# Altium PCB PCB.pcbdoc
Units mm, origin at the board's own origin, x right, y up, seen from the top; angles counter-clockwise.
Board outline 111.7 x 68.8 mm, 2 copper layers (Top Layer, Bottom Layer); 48 components, 41 nets, 192 pads, 85 vias.
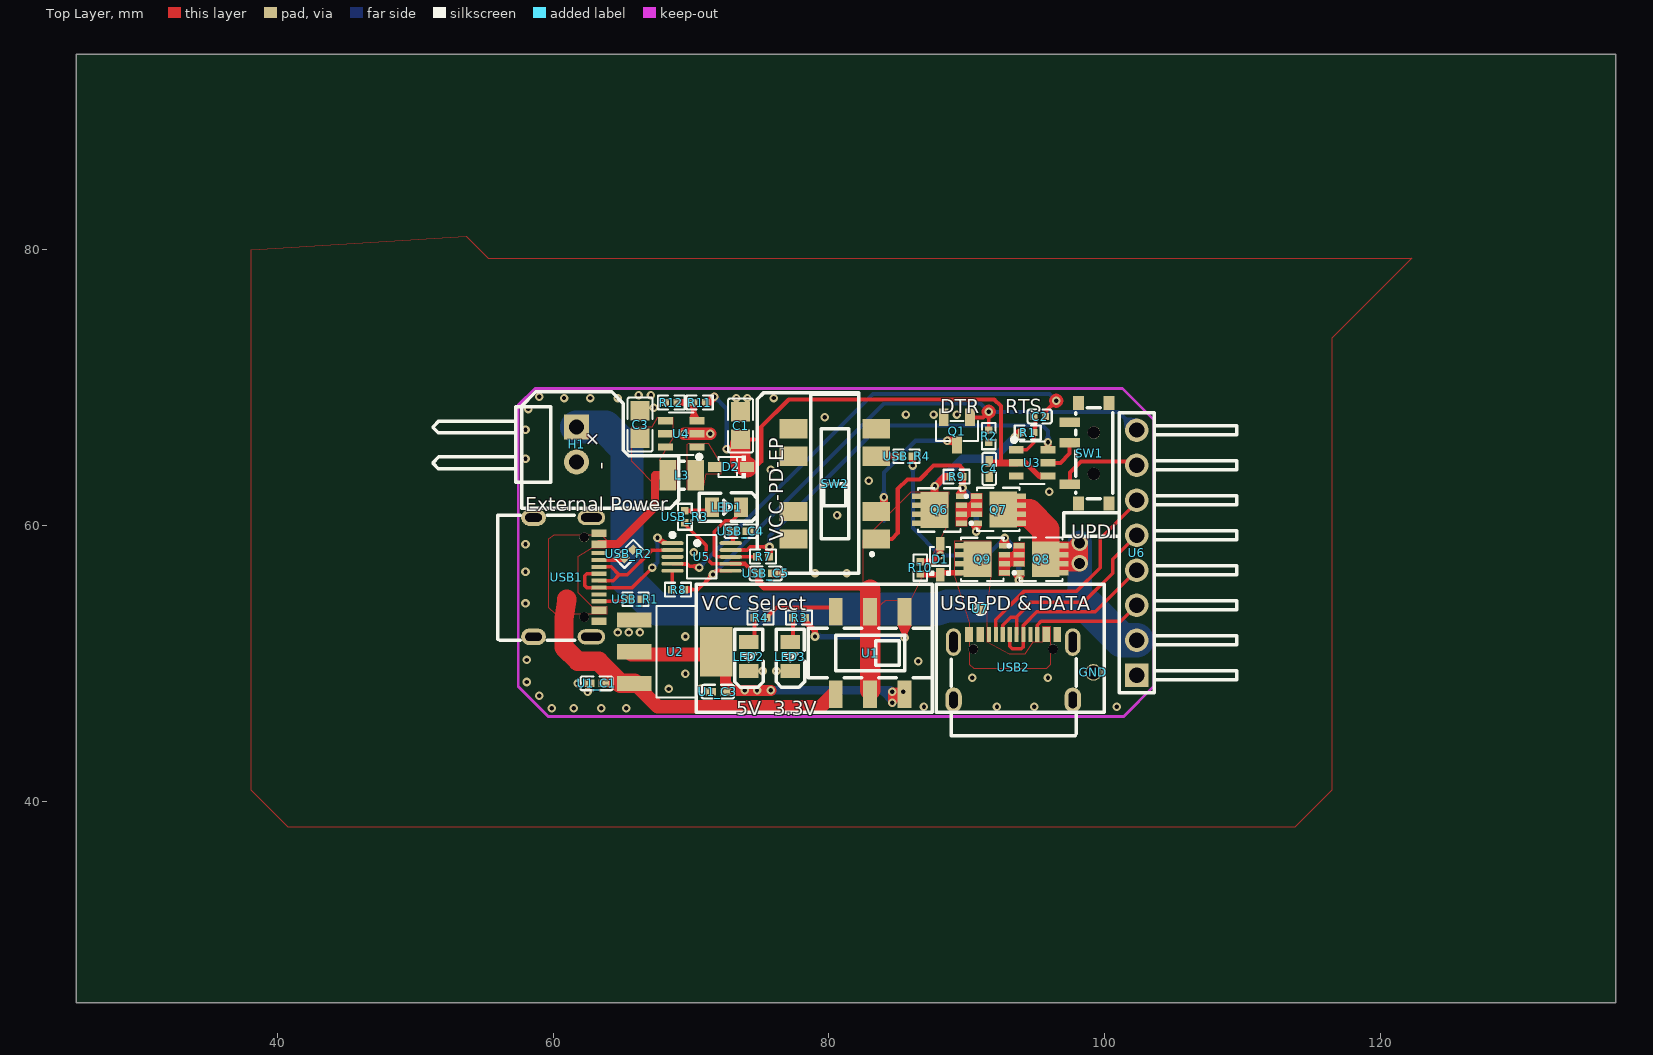
[diagram p0: Top Layer view]
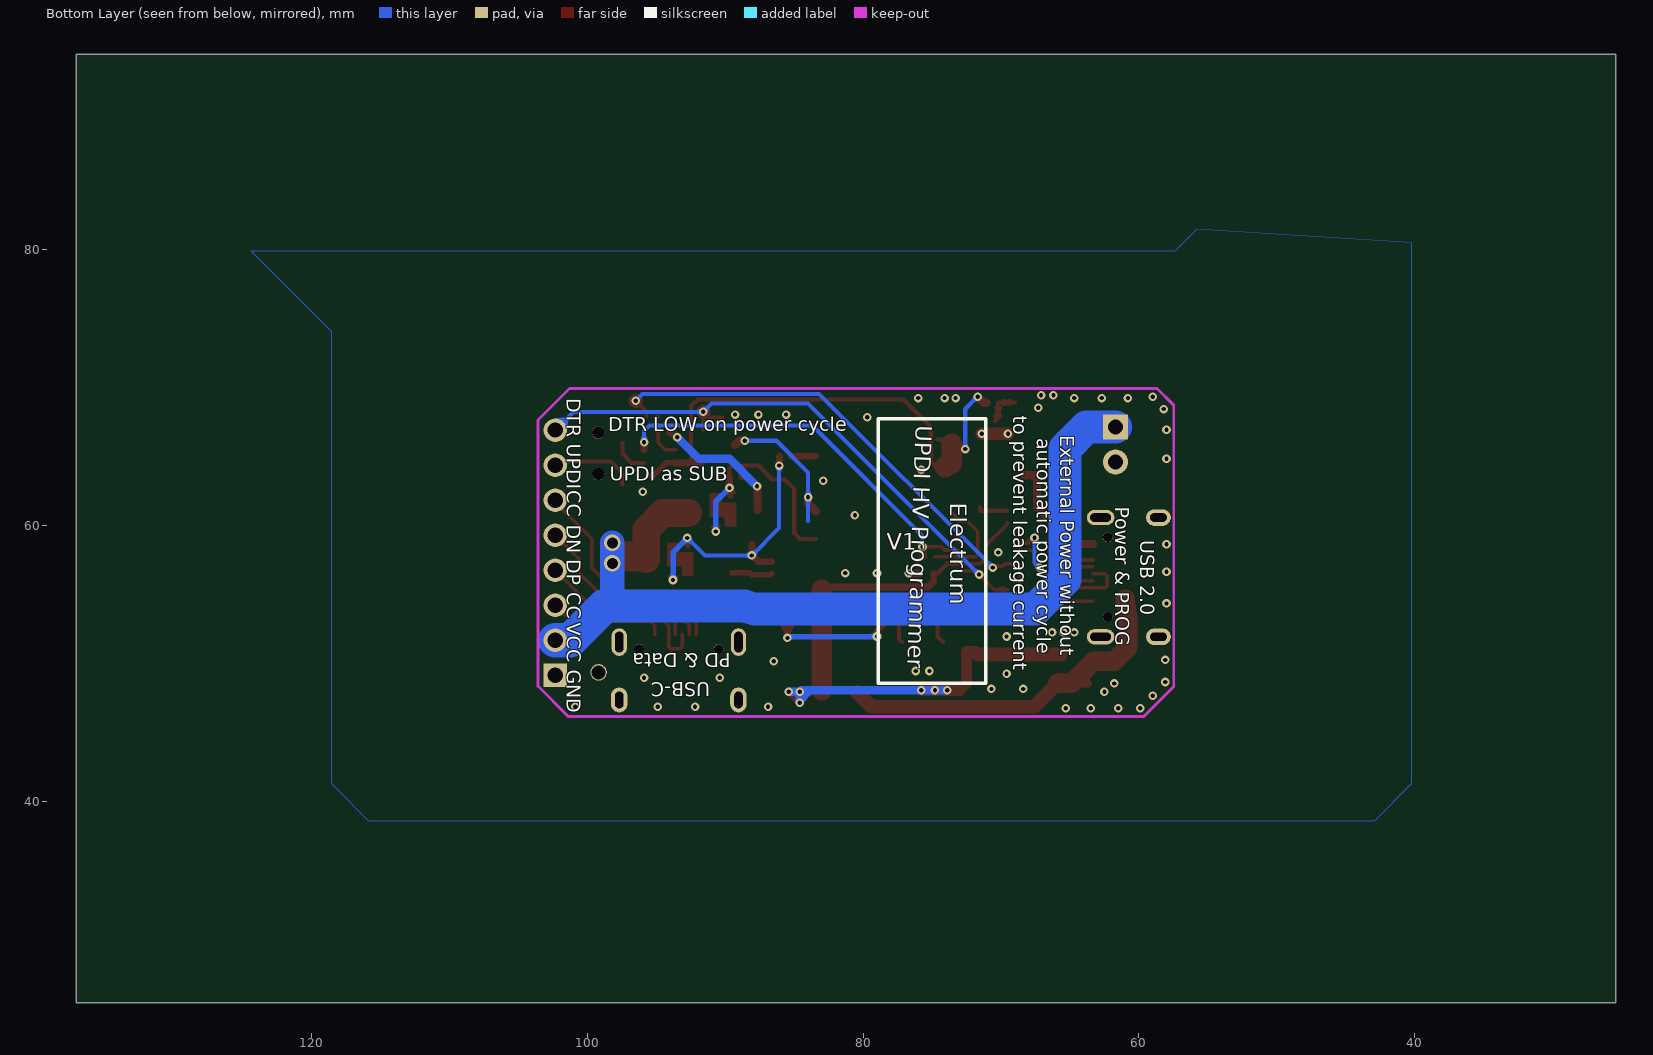
[diagram p1: Bottom Layer view, seen from below]

## Layer stack, top to bottom
Top Layer: signal copper (thickness not stored)
Dielectric: dielectric 0.32, FR-4, Dk 4.8
Bottom Layer: signal copper (thickness not stored)

## Board outline
137.1,25.4 25.4,25.4 25.4,94.2 137.1,94.2

## Components (designator, comment, footprint, x,y, rotation, side; value= is the part's Value field where it differs from the comment)
C1 "10uF" C0805 73.6,67.25 r270 top
C2 "10nF" C0402#1 95.3,67.91 r0 top
C3 "10uF" C0805 66.309,67.325 r270 top
C4 "100nF" C0402#2 91.64,64.115 r90 top
D1 "20V Zener" SOD-323_L1.7-W1.3-LS2.5-RD-1 88.082,57.55 r90 top
D2 "1N5819WS" SOD-323_L1.8-W1.3-LS2.5-RD 72.9,64.25 r180 top
DTR "TESTPOINT" TEST_TESTPOINT 91.6,68.25 r270 top
GND "CC" RINGTESTPOINT 99.2,49.35 r0 top
H1 "PZ254R-11-02P" HDR-TH_2P-P2.54-H-M-W10.4 61.7,65.88 r270 top
L3 "10uH" IND-SMD_L2.5-W2.0 69.335,63.646 r0 top
LED1 "Green" LED0805-R-RD 72.59,61.33 r180 top
LED2 "Red" LED0805-R-RD 74.2,50.5 r90 top
LED3 "Green" LED0805-R-RD 77.2,50.5 r90 top
Q1 "AO3400A" SOT-23-3_L2.9-W1.3-P1.90-LS2.4-BR 89.3,66.85 r90 top
Q6 "DOZ30P03" PDFN-8_L3.1-W3.0-P0.65-LS3.3-BL 88.02,61.145 r90 top
Q7 "DOZ30P03" PDFN-8_L3.1-W3.0-P0.65-LS3.3-BL 92.3,61.15 r270 top
Q8 "DOZ30P03" PDFN-8_L3.1-W3.0-P0.65-LS3.3-BL 95.4,57.55 r270 top
Q9 "DOZ30P03" PDFN-8_L3.1-W3.0-P0.65-LS3.3-BL 91.14,57.555 r90 top
R1 "10kΩ" R0402 94.433,66.75 r180 top
R2 "100kΩ" R0402 91.6,66.483 r270 top
R3 "1kΩ" R0402 77.842,53.325 r180 top
R4 "1kΩ" R0402 75.042,53.325 r180 top
R7 "1kΩ" R0402 75.233,57.75 r0 top
R8 "4.7kΩ" R0402 69.067,55.35 r180 top
R9 "100kΩ" R0402 89.267,63.55 r180 top
R10 "100kΩ" R0402 86.64,56.943 r270 top
R11 "100kΩ" R0402 70.641,68.925 r0 top
R12 "5.1kΩ" R0402 68.576,68.925 r0 top
RTS "TESTPOINT" TEST_TESTPOINT 96.5,69.05 r0 top
SW1 "MS-12C02-G015" SW-SMD_MS-12C02-G015 98.9,65.25 r270 top
SW2 "MST23D18G2 125" SW-SMD_SHOU_MST23D18G2 80.442,63.025 r90 top
U1 "YSSP2AG00" SW-SMD_YSSP2AG00 83,50.75 r180 top
U1_C1 "10uF" C0402#2 63.155,48.55 r180 top
U1_C3 "10uF" C0402#2 71.955,47.95 r0 top
U2 "AMS1117-3.3" SOT-223-3_L6.5-W3.4-P2.30-LS7.0-BR 68.87,50.85 r180 top
U3 "COS4561TR" SOT-23-6_L2.9-W1.6-P0.95-LS2.8-TL 94.749,64.55 r0 top
U4 "MT3608" SOT-23-6_L2.9-W1.6-P0.95-LS2.8-BL 69.3,66.65 r90 top
U5 "CH340X" MSOP-10_L3.0-W3.0-P0.50-LS5.0-BL 70.775,57.725 r270 top
U6 "X6511WR-08H-C30D60R1" HDR-TH_8P-P2.54-H-M-W7.7-P 102.34,58.03 r90 top
U7 "PD" TESTPOINT 91,53.95 r0 top
USB1 "TYPE-C 16PIN 2MD(073)" USB-C-SMD_TYPE-C-6PIN-2MD-073 60.96,56.255 r270 top
USB2 "TYPE-C 16PIN 2MD(073)" USB-C-SMD_TYPE-C-6PIN-2MD-073 93.375,49.725 r0 top
USB_C4 "100nF" C0402#2 73.605,59.59 r0 top
USB_C5 "100nF" C0402#2 75.43,56.525 r180 top
USB_R1 "5.1kΩ" R0402 65.967,54.65 r0 top
USB_R2 "5.1kΩ" R0402 65.494,57.944 r45 top
USB_R3 "5.1kΩ" R0402 69.56,60.637 r270 top
USB_R4 "5.1kΩ" R0402 85.64,65.03 r180 top

## Footprints (in the part's own frame and the unit in brackets; to place one, negate y for a bottom-side part, rotate by r counter-clockwise, add the part's x,y. Pads: shape width x height; smd on the part's side, far side on the other; paste and mask are expansions set on the pad)
C0402#1 [mm]
  rect 0.5x0.54 smd paste+0 mask+0.051: 1(-0.42,0) 2(0.42,0)
  silkscreen extent -0.87,-0.5 0.87,0.5
C0402#2 [mm]
  rect 0.79x0.54 smd paste-100 mask+0.051: 1(-0.545,0) 2(0.545,0)
  silkscreen extent -1.17,-0.5 1.17,0.5
C0805 [mm]
  rect 1.41x1.35 smd paste-100 mask+0.051: 1(-1,0) 2(1,0)
  silkscreen extent -1.96,-0.9 1.96,0.9
HDR-TH_2P-P2.54-H-M-W10.4 [mm]
  rect 1.8x1.8 hole 1.1 paste+0 mask+0.051: 1(-1.27,0)
  round 1.8 hole 1.1 paste+0 mask+0.051: 2(1.27,0)
  silkscreen extent -2.74,-10.4 2.74,-1.86
HDR-TH_8P-P2.54-H-M-W7.7-P [mm]
  rect 1.7x1.7 hole 1.1 paste+0 mask+0.05: 1(-8.89,0)
  round 1.7 hole 1.1 paste+0 mask+0.05: 2(-6.35,0) 3(-3.81,0) 4(-1.27,0) 5(1.27,0) 6(3.81,0) 7(6.35,0) 8(8.89,0)
  silkscreen extent -10.17,-7.25 10.17,1.27
IND-SMD_L2.5-W2.0 [mm]
  rect 1.2x2.2 smd paste+0 mask+0.051: 1(1.028,0) 2(-1.028,0)
  silkscreen extent -0.2,-1.02 0.2,1.02
LED0805-R-RD [mm]
  rect 1x1.4 smd paste+0 mask+0.051: 1(1.05,0) 2(-1.05,0)
  silkscreen extent -2.22,-1.04 1.99,1.01
MSOP-10_L3.0-W3.0-P0.50-LS5.0-BL [mm]
  oval 0.28x1.62 smd paste+0 mask+0.051: 1(-1,-2.11) 2(-0.5,-2.11) 3(0,-2.11) 4(0.5,-2.11) 5(1,-2.11) 6(1,2.11) 7(0.5,2.11) 8(0,2.11) 9(-0.5,2.11) 10(-1,2.11)
  silkscreen extent -1.74,-2.26 1.58,1.07
PDFN-8_L3.1-W3.0-P0.65-LS3.3-BL [mm]
  rect 0.4x0.8 smd paste-100 mask+0.051: 1(-0.975,-1.6) 2(-0.325,-1.6) 3(0.325,-1.6) 4(0.975,-1.6) 5(0.975,1.6) 6(0.325,1.6) 7(-0.325,1.6) 8(-0.975,1.6)
  rect 2.6x2 smd paste-100 mask+0.051: 9(-0.005,0.35)
  silkscreen extent -1.59,-2.41 1.56,1.55
R0402 [mm]
  rect 0.566x0.54 smd paste-100 mask+0.051: 1(-0.433,0) 2(0.433,0)
  silkscreen extent -0.94,-0.5 0.94,0.5
RINGTESTPOINT [mm]
  round 1.2 hole 1 paste+0 mask+0.102: 1(0,0)
SOD-323_L1.7-W1.3-LS2.5-RD-1 [mm]
  rect 0.985x0.6 smd paste+0 mask+0.051: 1(-1.117,0) 2(1.117,0)
  silkscreen extent -1.15,-0.73 0.9,0.73
SOD-323_L1.8-W1.3-LS2.5-RD [mm]
  rect 1x0.7 smd paste+0 mask+0.051: 1(-1.173,0) 2(1.173,0)
  silkscreen extent -1.08,-0.8 0.9,0.8
SOT-23-3_L2.9-W1.3-P1.90-LS2.4-BR [mm]
  rect 1.25x0.7 smd paste+0 mask+0.051: 1(1,-0.95) 2(1,0.95) 3(-1,0)
  silkscreen extent -0.73,-1.53 0.73,1.53
SOT-23-6_L2.9-W1.6-P0.95-LS2.8-BL [mm]
  rect 0.532x1.072 smd paste+0 mask+0.051: 1(-0.95,-1.149) 2(0,-1.149) 3(0.95,-1.149) 4(0.95,1.149) 5(0,1.149) 6(-0.95,1.149)
  silkscreen extent -1.82,-1.45 1.54,0.89
SOT-23-6_L2.9-W1.6-P0.95-LS2.8-TL [mm]
  rect 1.072x0.532 smd paste+0 mask+0.051: 1(-1.149,0.95) 2(-1.149,0) 3(-1.149,-0.95) 4(1.149,-0.95) 5(1.149,0) 6(1.149,0.95)
  silkscreen extent -1.45,-1.54 0.89,1.82
SOT-223-3_L6.5-W3.4-P2.30-LS7.0-BR [mm]
  rect 2.5x1.1 smd paste+0 mask+0.051: 1(2.97,-2.3) 2(2.97,0) 3(2.97,2.3)
  rect 2.34x3.6 smd paste+0 mask+0.051: 4(-2.97,0)
  silkscreen extent -1.57,-3.33 1.37,3.33
SW-SMD_MS-12C02-G015 [mm]
  rect 0.7x1.5 smd paste+0 mask+0.051: 1(2.25,-1.427) 2(-0.75,-1.427) 3(-2.25,-1.427)
  rect 1x0.8 smd paste+0 mask+0.051: 4(-3.65,-0.773) 5(-3.65,1.427) 6(3.65,1.427) 7(3.65,-0.773)
  round 0.9 hole 0.9 unplated paste+0: ""(-1.5,0.327) ""(1.5,0.327)
  silkscreen extent -3.3,-1 3.3,1.7
SW-SMD_SHOU_MST23D18G2 [mm]
  rect 1.4x2 smd paste+0 mask+0.051: 1(-4,-3) 2(-2,-3) 3(2,-3) 4(4,-3) 5(4,3) 6(2,3) 7(-2,3) 8(-4,3)
  silkscreen extent -6.5,-2.8 6.5,1.75
SW-SMD_YSSP2AG00 [mm]
  rect 1x2 smd paste+0 mask+0.05: 1(-2.5,3) 2(0,3) 3(2.5,3) 4(-2.5,-3) 5(0,-3) 6(2.5,-3)
  silkscreen extent -4.5,-1.8 4.5,1.8
TEST_TESTPOINT [mm]
  Top Layer region: -0.5,0 -0.496,0.06 -0.485,0.12 -0.468,0.177 -0.443,0.232 -0.411,0.284 -0.374,0.331 -0.331,0.374 -0.284,0.411 -0.232,0.443 -0.177,0.468 -0.12,0.485 -0.06,0.496 0,0.5 0,0.5 0.06,0.496 0.12,0.485 0.177,0.468 0.232,0.443 0.284,0.411 0.331,0.374 0.374,0.331 0.411,0.284 0.443,0.232 0.468,0.177 0.485,0.12 0.496,0.06 0.5,0 0.5,0 0.496,-0.06 0.485,-0.12 0.468,-0.177 0.443,-0.232 0.411,-0.284 0.374,-0.331 0.331,-0.374 0.284,-0.411 0.232,-0.443 0.177,-0.468 0.12,-0.485 0.06,-0.496 0,-0.5 0,-0.5 -0.06,-0.496 -0.12,-0.485 -0.177,-0.468 -0.232,-0.443 -0.284,-0.411 -0.331,-0.374 -0.374,-0.331 -0.411,-0.284 -0.443,-0.232 -0.468,-0.177 -0.485,-0.12 -0.496,-0.06
TESTPOINT [mm]
  round 1 smd paste+0 mask+0.102: 1(0,0)
  silkscreen extent -0.46,-0.46 0.46,0.46
USB-C-SMD_TYPE-C-6PIN-2MD-073 [mm]
  rect 0.55x1.1 smd paste-100 mask+0.05: 1(-3.2,2.375) 2(-2.4,2.375) 11(2.4,2.375) 12(3.2,2.375)
  rect 0.3x1.1 smd paste-100 mask+0.05: 3(-1.75,2.375) 4(-1.25,2.375) 5(-0.75,2.375) 6(-0.25,2.375) 7(0.25,2.375) 8(0.75,2.375) 9(1.25,2.375) 10(1.75,2.375)
  oval 1.1x2 hole 0.6 slot 1.5 at 90 deg paste+0 mask+0.05: 13(-4.325,1.825) 14(4.325,1.825)
  oval 1.2x1.8 hole 0.6 slot 1.2 at 90 deg paste+0 mask+0.05: 13(-4.325,-2.375) 14(4.325,-2.375)
  round 0.7 hole 0.7 unplated paste+0: ""(-2.89,1.305) ""(2.89,1.305)
  silkscreen extent -4.5,-4.97 4.57,0.6

## Via types
v1: diameter 0.62, hole 0.31, Top Layer to Bottom Layer, tented both sides, 83 vias
v2: diameter 1.2, hole 0.8, Top Layer to Bottom Layer, tented both sides, 2 vias

## Nets (pads, with @x,y where several pads share a name; then routed paths per layer and width w, separated by ;. In a path a pad name is that pad's centre, name@x,y a point inside that pad or via, vN(x,y) a via of type N, cw(c..) or ccw(c..) an arc to the next point about the centre after c; other vN are vias at no path point)
3.3V: U1.1 U1_C3.2 U2.2 U2.4 | length 31.1
  Top Layer w0.6: U1.1@85.075,47.925 85.375,47.925 v1(85.4,47.95) ; v1(84.6,47.95) v1(84.6,47.15) v1(85.4,47.95) ; v1(84.6,47.95) v1(85.4,47.95) ; v1(84.6,47.95) v1(85.4,47.95)
  Top Layer w0.8: U2.4@71.841,50.849 72.501,50.849 72.501,48.55 72.999,48.05 73.901,48.05 v1(74.8,48.05) v1(75.8,48.05)
  Top Layer w1: U2.2@65.7,50.65 U2.4@71.64,50.65
  Bottom Layer w0.6: v1(73.9,48.05) v1(74.8,48.05) v1(75.8,48.05) 84.5,48.05 v1(84.6,47.95) ; v1(84.6,47.95) v1(84.6,47.15) 84.6,47.307 83.957,47.95 v1(85.4,47.95) v1(84.6,47.95)
12V: C1.2 C4.2 D2.1 R11.2 U3.2 U3.4 | length 39.4
  Top Layer w0.3: C1.2@73.575,65.926 73.9,66.251 74.599,66.251 ; 74.599,64.151 75.099,64.649 75.099,67.151 77.098,69.15 92.001,69.15 92.491,68.66 92.491,64.55
  Top Layer w0.4: U3.2@93.601,64.55 94.299,64.55 95.249,63.6 U3.4@95.628,63.6
  Top Layer w0.5: C4.2 91.75,64.55 U3.2
  Top Layer w0.6: R11.2@71.081,68.913 71.263,68.913 v1(71.7,69.35) ; v1(72.6,65.55) 73.2,65.55 C1.2@73.575,65.925
  Top Layer w1.5: C1.2@73.575,65.925 73.575,64.497 D2.1
  Bottom Layer w0.3: v1(71.7,69.35) 72.6,68.45 v1(72.6,65.55)
DN: U5.2 USB1.5 USB1.7 | length 7.9
  Top Layer w0.254: USB1.7 64.354,56.005 64.782,56.433 ; USB1.5 64.209,57.005 64.782,56.433 ; U5.2@68.666,58.225 67.175,58.225 65.384,56.432 64.782,56.432
DP: U5.1 USB1.6 USB1.8 | length 10.9
  Top Layer w0.254: USB1.8 62.445,55.505 62.3,55.65 62.3,56.351 62.455,56.506 USB1.6 ; USB1.8 65.755,55.505 v1(67.2,56.95)
  Top Layer w0.3: v1@67.576,59.124 67.975,58.726 U5.1@68.666,58.726
  Bottom Layer w0.3: v1(67.2,56.95) 67.575,57.325 v1(67.575,59.125)
GND: C1.1 C3.1 C4.1 GND.1 H1.2 LED2.2 LED3.2 Q1.2 R2.2 R12.1 U1_C1.2 U1_C3.1 U2.1 U3.3 U4.2 U5.3 U6.1 USB1.1 USB1.12 USB1.13 USB1.14 USB2.1 USB2.12 USB2.13 USB2.14 USB_C4.2 USB_C5.1 USB_R1.2 USB_R2.2 | length 2.6
  Top Layer w0.6: USB_C5.1@75.976,56.526 v1@76.7,56.549
  Top Layer w0.9: v1(69.5,66.65) v1(71.4,66.65)
  other v1: 59.9,46.75 61.5,46.75 63.5,46.75 65.3,46.75 86.9,46.85 92.2,46.85 94.9,46.85 100.9,46.85 59,47.65 62.5,47.95 68.4,48.15 70.7,48.15 61.8,48.55 58.1,48.65 90.4,48.95 95.9,48.95 69.6,49.25 75.2,49.45 76.2,49.45 86.5,50.15 58.1,50.25 69.6,51.95 64.7,52.25 65.5,52.25 66.3,52.25 58,54.35 76.7,56.55 79,56.55 81.3,56.55 58,56.65 70.2,58.05 58,58.65 80.6,60.75 96,62.45 82.9,63.25 75.8,64.05 58,64.85 58,66.95 79.7,67.85 85.6,68.05 87.6,68.05 89.3,68.05 58.2,68.45 67.3,68.55 60.8,69.25 62.7,69.25 64.7,69.25 73.3,69.25 74.1,69.25 76,69.25 59,69.35 66.2,69.45 67.1,69.45
LED1_1: LED1.1 USB_R3.1 | length 2.2
  Top Layer w0.3: USB_R3.1 71.539,61.07 LED1.1
LEDGREEN: R3.1 U1.4 | length 10.1
  Top Layer w0.4: R3.1 78.274,53.074 79.001,52.35 v1@79.001,51.949 ; v1@85.501,51.85 U1.4@85.501,53.75
  Bottom Layer w0.4: v1(79,51.95) 85.4,51.95 v1(85.5,51.85)
LEDRED: R4.1 U1.6 | length 5.6
  Top Layer w0.3: R4.1 76.199,54.049 80.499,54.049 U1.6
PIN_CC1: U6.6 USB2.4 | length 16.2
  Top Layer w0.254: USB2.4@92.125,52.099 92.125,53.176 94.2,55.251 98,55.251 99.699,56.95 99.699,59.048 102.341,61.69 U6.6@102.341,61.84
PIN_CC2: U6.3 USB2.10 | length 8.5
  Top Layer w0.254: USB2.10@95.125,52.096 95.125,52.774 95.399,53.049 101.169,53.049 U6.3
PIN_DN: U6.5 USB2.5 USB2.7 | length 14.9
  Top Layer w0.254: USB2.5 92.625,52.774 93.202,53.351 93.624,53.351 ; USB2.7 93.624,53.374 94.701,54.451 98.5,54.451 100.601,56.549 100.601,57.56 U6.5@102.341,59.3
PIN_DP: U6.4 USB2.6 USB2.8 | length 13.4
  Top Layer w0.254: USB2.6 93.125,51.245 93.32,51.05 93.96,51.05 94.125,51.215 USB2.8 ; USB2.8 94.124,52.774 95.099,53.75 99.331,53.75 U6.4@102.341,56.76
PIN_DTR: Q1.1 R2.1 R8.1 U5.6 U6.8 | length 43.5
  Top Layer w0.254: R8.1 70.499,55.35 v1(71.6,56.45) 71.876,56.724 U5.6@72.885,56.724 ; R2.1 v1(91.6,68.25)
  Top Layer w0.3: Q1.1 91.2,67.85 v1(91.6,68.25)
  Bottom Layer w0.3: v1(71.6,56.45) 84,68.85 91,68.85 v1(91.6,68.25) 101.01,68.25 U6.8
PIN_UPDI: SW1.1 U6.7 | length 6.3
  Top Layer w0.3: SW1.1@97.474,63 97.5,63.026 97.5,63.849 98.3,64.649 102.341,64.649 U6.7@102.341,64.38
PIN_VCC: H1.1 Q7.5 Q7.6 Q7.7 Q7.8 Q7.9 Q8.5 Q8.6 Q8.7 Q8.8 Q8.9 U6.2 | length 71.1
  Top Layer w1: Q8.9 97.004,57.555
  Top Layer w1.2: Q8.9 96.445,58.25 97.7,58.25 v2(98.2,58.75) v2(98.2,57.25) 96.055,57.25 Q8.9
  Top Layer w2: Q7.9@92.689,60.91 94.541,60.91 95.75,59.701 Q8.9
  Bottom Layer w1.8: 98.2,54.35 v2(98.2,58.75)
  Bottom Layer w2.4: H1.1@61.701,67.151 63.799,67.151 65.361,65.589 65.361,56.089 67.5,53.95 87.901,53.95 88.6,54.151 98.8,54.151
  Bottom Layer w2.5: 98.8,54.15 101.27,51.68 U6.2
Q1_3: Q1.3 SW2.2 | length 11.1
  Top Layer w0.6: SW2.2 84,61.583 v1(84,62.05) ; v1(88.6,66.15) 89,66.15 Q1.3
  Bottom Layer w0.3: 84,60.35 v1(84,62.05) 84,63.85 86.3,66.15 v1(88.6,66.15)
Q6_1: Q6.1 Q6.2 Q6.3 Q7.1 Q7.2 Q7.3
Q8_1: Q8.1 Q8.2 Q8.3 Q9.1 Q9.2 Q9.3
Q8_4: D1.2 Q8.4 Q9.4 R10.1 USB_R4.1 | length 20.3
  Top Layer w0.4: Q9.4 v1(92.76,59.099) ; v1(93.8,56.05) Q8.4@93.799,56.574
  Top Layer w0.5: USB_R4.1 86.073,64.377 v1(86.1,64.35) ; R10.1 87.625,57.376 v1(88.08,57.83) 88.08,58.665 D1.2
  Bottom Layer w0.3: v1(86.1,64.35) 86.1,59.81 v1(88.08,57.83) 91.491,57.83 v1(92.76,59.099)
  Bottom Layer w0.4: v1(92.76,59.099) 93.799,58.06 v1(93.8,56.05)
R3_2: LED3.1 R3.2 | length 1.9
  Top Layer w0.3: LED3.1 77.409,51.759 R3.2
R4_2: LED2.1 R4.2 | length 1.9
  Top Layer w0.3: LED2.1 74.609,51.959 R4.2
RTS: C2.2 U5.4 | length 34.8
  Top Layer w0.254: U5.4@68.666,57.224 69.725,57.224 69.9,57.049 70.499,57.049 v1@70.601,56.95
  Top Layer w0.3: C2.2 95.72,68.27 v1(96.5,69.05)
  Bottom Layer w0.3: v1(70.6,56.95) 83.201,69.551 96.001,69.551 v1(96.5,69.05)
RXD: R7.2 U3.6 U5.9 | length 29.5
  Top Layer w0.254: U5.9 74.075,58.225 74.3,58.45 v1(75.7,58.45)
  Top Layer w0.5: U3.6 95.898,66.048 v1(95.9,66.05)
  Top Layer w0.6: R7.2 75.666,58.416 v1(75.7,58.45)
  Bottom Layer w0.3: v1@75.699,58.449 75.699,59.249 83.7,67.25 95.501,67.25 95.899,66.851 v1(95.9,66.05)
S$6538: 
S$14439: 
S$22567: 
S$22571: 
TXD: LED1.2 R7.1 U5.8 | length 7.7
  Top Layer w0.254: U5.8 71.825,57.725 71.701,57.849 71.701,59.551 72.501,60.351 73.001,60.351 73.639,60.989 LED1.2@73.639,61.329 ; U5.8 72.91,57.75 R7.1
U3_1: C2.1 R1.1 U3.1 | length 3.5
  Top Layer w0.254: U3.1 94.35,65.5 94.865,66.015 R1.1
  Top Layer w0.3: R1.1 94.865,67.015 95,67.15 95,67.79 C2.1
U4_1: D2.2 L3.1 U4.1
U4_3: R11.1 R12.2 U4.3 | length 2.6
  Top Layer w0.3: R12.2@69.008,68.924 70.207,68.924 70.207,67.839 U4.3
U5_5: R8.2 U5.5 | length 1.4
  Top Layer w0.254: R8.2 68.634,56.694 U5.5
U5_10: U5.10 USB_C4.1 | length 0.9
  Top Layer w0.254: U5.10 73.06,58.901 USB_C4.1@73.06,59.589
UPDI: SW1.2 U3.5 | length 2.6
  Top Layer w0.3: U3.5 96.8,64.55 97.473,65.223 SW1.2
USB_R1_1: USB1.10 USB_R1.1 | length 2.3
  Top Layer w0.254: USB1.10 65.534,54.505 USB_R1.1
USB_R2_1: USB1.4 USB_R2.1 | length 1.9
  Top Layer w0.3: USB1.4 65.055,57.505 USB_R2.1@65.188,57.638
USBCPD_VBUS: D1.1 Q9.5 Q9.6 Q9.7 Q9.8 Q9.9 R10.2 U7.1 USB2.2 USB2.11 | length 3
  Top Layer w0.4: R10.2 86.717,56.432 88.082,56.432 88.23,56.58 Q9.8
USBCPD_VBUS_GATE: SW2.3 USB_R4.2 | length 1.8
  Top Layer w0.5: SW2.3@83.443,65.025 USB_R4.2
VBUS: C3.2 L3.2 U1.3 U1_C1.1 U2.3 U4.4 U4.5 USB1.2 USB1.11 | length 37
  Top Layer w0.6: USB1.2@63.334,58.654 64.706,58.654 67.4,61.349 67.4,63.646 68.307,63.646 67.596,63.646 67.4,63.45 ; U1_C1.1 U2.3
  Top Layer w1: U2.3 67.599,46.851 79.402,46.851 U1.3@80.477,47.926
  Top Layer w1.4: 61,54.649 60.799,53.252 60.799,51.149 61.8,50.151 63.304,50.151 64.899,48.55 U2.3
VCC: Q6.5 Q6.6 Q6.7 Q6.8 Q6.9 R1.2 R9.2 U1.2 U1.5 U5.7 USB_C5.2 USB_R3.2 | length 35.9
  Top Layer w0.254: USB_R3.2 69.56,60.09 71.099,58.55 71.099,57.651 71.526,57.224 U5.7@72.885,57.224
  Top Layer w0.3: U5.7@72.885,57.224 73.926,57.224 74.624,56.526 USB_C5.2
  Top Layer w0.5: USB_C5.2 74.884,55.967 75.3,55.551 82.3,55.551 83.075,54.776 U1.5@83.075,53.925 ; v1(87.7,62.85) 88.4,63.55 R9.2
  Top Layer w0.6: Q6.9 87.67,62.82 v1(87.7,62.85) ; v1(93.5,66.41) 93.84,66.75 R1.2
  Top Layer w1.5: U1.2@83,48.05 83,55.35
  Bottom Layer w0.6: v1(87.7,62.85) 89.7,64.85 91.94,64.85 v1(93.5,66.41)
VCC_GATE: Q6.4 Q7.4 R9.1 SW2.1 | length 16.7
  Top Layer w0.3: SW2.1@83.443,59.025 84.576,59.025 85,59.449 85,62.449 85,62.65 85.699,63.351 86.601,63.351 87.599,64.349 89.499,64.349 89.699,64.151 R9.1@89.699,63.549
  Top Layer w0.4: Q6.4@89.621,62.119 89.699,62.2 v1(89.7,62.73) ; v1@90.7,59.569 Q7.4@90.7,60.173
  Top Layer w0.5: v1(89.7,62.73) R9.1
  Bottom Layer w0.4: v1(89.7,62.73) 90.7,61.73 v1(90.7,59.57)
pads on no net: SW1. SW1.3 SW1.4 SW1.5 SW1.6 SW1.7 SW2.4 SW2.5 SW2.6 SW2.7 SW2.8 U4.6 USB1. USB1.3 USB1.9 USB2. USB2.3 USB2.9

## Polygon pours and split planes (outlines as drawn)
GND on Bottom Layer (solid): 55.8,81.5 57.4,79.9 124.4,79.9 118.6,74.1 118.6,41.3 115.9,38.6 42.9,38.6 40.2,41.3 40.2,80.5
USBCPD_VBUS on Top Layer (solid): 89.1,58.85 89.1,56.35 90.2,52.95 90.2,49.95 90.5,49.65 93,49.65 95.8,49.65 96.1,49.95 96.1,52.65 95.5,52.65 95.5,51.55 94.8,51.55 94.2,50.65 93.1,50.65 91.5,51.55 91.5,53.75 91.8,56.35 91.8,58.85
VBUS on Top Layer (solid): 68.7,67.85 68.7,66.35 67.7,64.75 68.9,64.75 68.9,62.65 67.7,62.65 65.7,64.65 65.7,67.15 67.2,67.15 67.6,67.85
U4_1 on Top Layer (solid): 69.8,65.95 69.7,65.85 69.7,64.75 69.7,62.65 70.9,62.65 71.1,63.75 72.2,63.75 72.2,64.45 71.3,65.95
VBUS on Top Layer (solid): 60.2,53.55 59.7,54.05 59.7,59.05 60.1,59.35 63.5,59.35 63.9,58.95 63.9,58.35 62.8,58.35 61.8,57.75 61.8,55.15 62.8,54.15 63.9,54.15 63.9,53.55 60.2,53.55
VCC on Top Layer (solid): 82.5,54.55 82.5,58.95 86,62.45 88.7,62.45 88.5,59.85 85.9,54.55 84.1,54.55 83.5,54.05
GND on Top Layer (solid): 53.7,81 55.3,79.4 122.3,79.4 116.5,73.6 116.5,40.8 113.8,38.1 40.8,38.1 38.1,40.8 38.1,80

## Other copper
Top Layer:
  region net PIN_DTR: 69.783,55.08 69.783,55.62 70.158,55.475 70.158,55.225
  region net PIN_DTR: 71.619,56.141 71.291,56.469 71.213,56.24 71.39,56.063
  region net PIN_DTR: 71.909,56.431 71.581,56.759 71.787,56.813 71.964,56.637
  region net PIN_DTR: 72.215,56.585 72.215,56.865 71.875,56.85 71.875,56.6
  region net LEDGREEN: 78.767,52.155 79.232,52.155 79.2,52.35 78.8,52.35
  region net LEDGREEN: 78.558,53.092 77.992,53.055 78.576,52.491 79.107,52.526
  region net LEDGREEN: 86,52.75 85,52.75 85.3,52.15 85.7,52.15
  region net LEDGREEN: 85.267,52.055 85.732,52.055 85.7,52.272 85.3,52.272
  region net 12V: 95.362,63.334 95.362,63.866 95.25,63.8 95.25,63.4
  region net 12V: 94.136,64.816 94.136,64.284 94.3,64.35 94.3,64.75
  region net Q8_4: 94.2,56.375 93.4,56.375 93.6,56.05 94,56.05
  region net Q8_4: 93.567,56.255 94.032,56.255 94,56.472 93.6,56.472
  region net Q8_4: 92.34,58.73 93.14,58.73 92.96,59.099 92.56,59.099
  region net Q8_4: 92.528,58.894 92.993,58.894 92.96,58.677 92.56,58.677
  region net VCC_GATE: 91.1,59.975 90.3,59.975 90.5,59.57 90.9,59.57
  region net VCC_GATE: 90.467,59.775 90.932,59.775 90.9,59.992 90.5,59.992
  region net VCC_GATE: 89.22,62.32 90.02,62.32 89.9,62.73 89.5,62.73
  region net VCC_GATE: 89.467,62.525 89.932,62.525 89.9,62.308 89.5,62.308
  region net U5_10: 73.148,58.812 72.988,58.865 72.713,58.865 72.883,58.9 72.988,58.865 73.338,58.865 73.148,58.812
  region net U5_10: 72.748,59.32 73.373,59.32 73.185,58.945 72.935,58.945
  region net RXD: 75.495,58.217 75.495,58.682 75.278,58.575 75.278,58.325
  region net RXD: 73.555,58.085 73.555,58.365 73.93,58.35 73.93,58.1
  region net RTS: 70.456,57.224 70.346,56.773 70.16,56.925 70.221,57.175
  region net RTS: 69.335,57.085 69.335,57.365 69.71,57.35 69.71,57.1
  region net DP: 67.866,58.671 68.332,58.865 67.824,59.088 67.556,58.931
  region net DP: 67.884,59.144 67.556,58.815 67.767,58.72 67.979,58.932
  region net U4_3: 69.926,69.195 69.926,68.655 69.476,68.775 69.476,69.075
  region net U4_3: 69.291,69.195 69.291,68.655 69.741,68.775 69.741,69.075
  region net U4_3: 69.913,67.866 70.584,67.866 70.359,68.316 70.059,68.316
  region net U4_3: 69.926,68.655 70.491,68.655 70.359,68.205 70.059,68.205
  region net Q6_1: 89.2,59.95 89.2,61.65 90.16,61.67 90.3,61.81 90.3,62.335 91.12,62.335 91.12,60.635 90.18,60.63 90.06,60.51 90.06,59.95
  region net Q8_1: 92.32,56.35 92.34,58.05 93.28,58.07 93.4,58.19 93.41,58.735 94.23,58.735 94.23,57.035 93.24,57.03 93.14,56.93 93.14,56.33
Bottom Layer:
  region net PIN_DTR: 91.619,68.559 91.291,68.23 91.196,68.442 91.408,68.654
  region net LEDGREEN: 79.205,51.717 79.205,52.182 79.422,52.15 79.422,51.75
  region net LEDGREEN: 85.356,52.124 85.246,51.673 85.041,51.75 85.139,52.15
  region net 12V: 72.009,69.369 71.68,69.041 71.892,68.945 72.104,69.158
  region net 12V: 72.368,65.755 72.833,65.755 72.75,65.972 72.45,65.972
  region net PIN_DTR: 71.909,56.431 71.581,56.759 71.792,56.854 72.005,56.642
  region net RTS: 70.909,56.93 70.581,57.259 70.792,57.354 71.005,57.142
  region net DP: 67.342,58.92 67.807,58.92 67.725,58.703 67.425,58.703
  region net DP: 67.509,56.93 67.181,57.259 67.392,57.354 67.605,57.142
  region net 3.3V: 76.005,47.817 76.005,48.282 76.222,48.35 76.222,47.75
  region net 3.3V: 84.456,48.224 84.346,47.773 84.117,47.75 84.263,48.35
  region net Q8_4: 93.069,59.119 92.741,58.79 92.917,58.659 93.2,58.942
  region net Q8_4: 94.032,56.256 93.567,56.254 93.599,56.472 93.999,56.472
  region net Q8_4: 88.285,57.597 88.285,58.062 88.502,57.98 88.502,57.68
  region net Q8_4: 92.779,58.79 92.451,59.119 92.356,58.907 92.568,58.695
  region net RXD: 96.132,66.255 95.667,66.255 95.749,66.472 96.049,66.472
  region net PIN_DTR: 91.805,68.017 91.805,68.482 92.022,68.4 92.022,68.1
  region net PIN_DTR: 101.492,66.867 102.393,67.768 101.628,67.844 101.416,67.632
  region net Q1_3: 88.395,65.917 88.395,66.382 88.178,66.3 88.178,66
  region net Q1_3: 83.767,62.255 84.232,62.255 84.15,62.472 83.85,62.472
  region net Q8_4: 85.867,64.145 86.332,64.145 86.25,63.928 85.95,63.928
  region net Q8_4: 88.099,58.139 87.77,57.811 87.675,58.022 87.887,58.234
  region net Q1_3: 83.767,61.845 84.232,61.845 84.15,61.628 83.85,61.628

## Silkscreen, mask and mechanical layers (free items; w line width, h text height)
Top Overlay:
  lines w0.254: 70.4,46.45 87.5,46.45 87.5,55.75 70.4,55.75 70.4,46.45 ; 87.8,46.45 100,46.45 100,55.75 87.8,55.75 87.8,46.45 ; 97.06,59.24 101.06,59.24 101.06,60.94 97.06,60.94 97.06,59.24
  lines w0.254 net S$14439: 57.65,68.601 58.749,69.701 64.249,69.701 65.099,68.85 65.099,65.452 65.501,65.05 69.1,65.05 69.1,61.85 68.5,61.25 57.741,61.25 57.741,68.67
  lines w0.254 net S$22567: 76.7,56.55 78.667,56.55 78.692,56.525
  lines w0.254 net S$22571: 74.82,58.309 74.82,69.17 75.3,69.65 82.191,69.65 82.191,69.328
  text "+" at 62.996,67.054 h1.14 r225
  text "-" at 63.971,64.05 h1.14 r90
  text "External Power" at 58,61.05 h1
  text "UPDI" at 97.6,59.05 h1
  text "VCC-PD-EP" at 76.7,58.85 h1 r90
  text "VCC Select" at 70.8,53.85 h1
  text "USB PD & DATA" at 88.1,53.85 h1
  text "5V" at 73.3,46.25 h1
  text "3.3V" at 76,46.25 h1
Bottom Overlay:
  lines w0.254: 71.1,48.55 78.9,48.55 78.9,67.75 71.1,67.75 71.1,48.55
  text "DTR" at 101.5,69.25 h1 r90
  text "to prevent leakage current" at 69.1,67.95 h1 r90
  text "UPDI HV Programmer" at 76.2,67.271 h1.2 r92
  text "DTR LOW on power cycle" at 98.5,66.85 h1
  text "External Power without" at 65.7,66.55 h1 r90
  text "automatic power cycle" at 67.4,66.35 h1 r90
  text "UPDI" at 101.5,65.95 h1 r90
  text "UPDI as SUB" at 98.4,63.25 h1
  text "CC" at 101.5,62.55 h1 r90
  text "Electrum" at 73.7,61.65 h1.2 r90
  text "Power & PROG" at 61.7,61.35 h1 r90
  text "DN" at 101.5,60.05 h1 r90
  text "USB 2.0" at 59.9,58.95 h1 r90
  text "V1" at 78.3,58.25 h1.2
  text "DP" at 101.5,57.55 h1 r90
  text "CC" at 101.5,55.15 h1 r90
  text "VCC" at 101.5,52.95 h1 r90
  text "PD & Data" at 89.6,50.75 h1 r180
  text "GND" at 101.5,49.55 h1 r90
  text "USB-C" at 91.1,48.65 h1 r180